# EAGLE board ATSAM_motor (EAGLE 9.1.0)
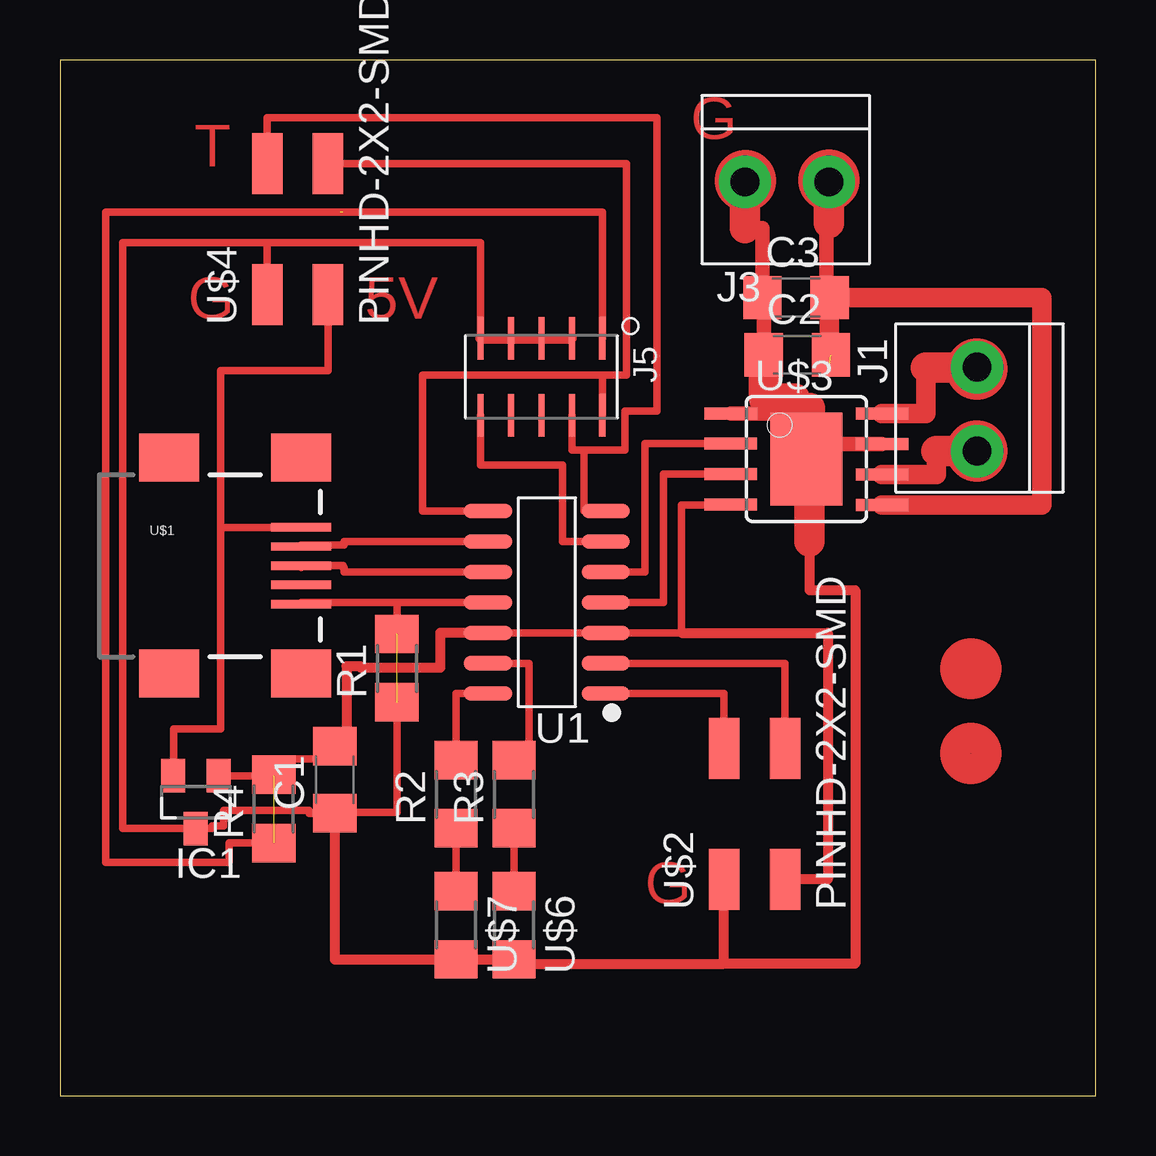
[diagram p0: board, top side]
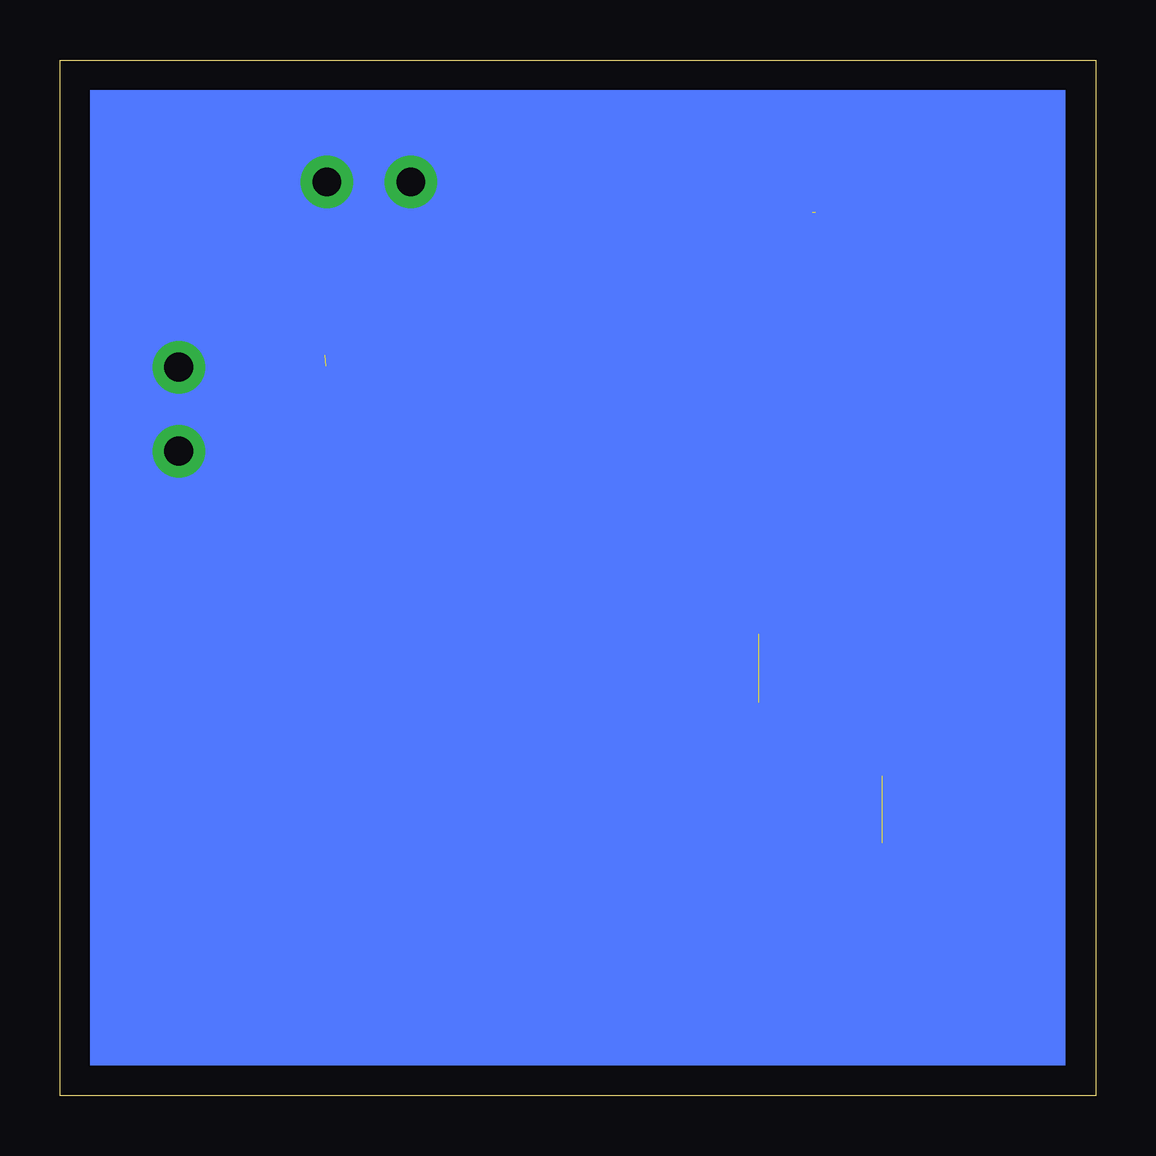
[diagram p1: board, bottom side, seen from below]

Size 43.18 x 43.18 mm. Coordinates in mm from the lower left corner, seen from the top.
Outline: 0,0 43.18,0 43.18,43.18 0,43.18 0,0
Copper layers (1*16): Top 0.035mm / dielectric 1.5mm / Bottom 0.035mm
Design rules "default *": minimum track width 10mil, minimum drill 24mil, track to track 16mil, track to pad 16mil, pad to pad 8mil, via to via 8mil, smd to smd 16mil, copper to edge 40mil, drill to drill 8mil, minimum pad ring 10mil, minimum via ring 8mil, stop-mask expansion 4mil, vias tented up to drill 0mil, thermal gap 10mil

## Footprints (pad centres in the part's own frame; a part is rotated, then mirrored left to right if it is on the bottom)
C1206 = smd 1.6 x 1.8: 1 -1.4,0; 2 1.4,0
SOT23 = smd 1 x 1.4: 1 -0.95,-1.1; 2 0.95,-1.1; 3 0,1.1
ED555DS-2DS = drill 1.2 pad 2.184: 1 1.8,0; 2 -1.7,0
2X5_1.27MM_SMD = smd 1.778 x 0.254: 1 -1.6,2.54; 2 1.6,2.54; 3 -1.6,1.27; 4 1.6,1.27; 5 -1.6,0; 6 1.6,0; 7 -1.6,-1.27; 8 1.6,-1.27; 9 -1.6,-2.54; 10 1.6,-2.54
R1206 = smd 1.6 x 1.803: 1 -1.422,0; 2 1.422,0
SOIC127P600X160-14N = smd 2 x 0.6: 1 -2.45,3.81; 2 -2.45,2.54; 3 -2.45,1.27; 4 -2.45,0; 5 -2.45,-1.27; 6 -2.45,-2.54; 7 -2.45,-3.81; 8 2.45,-3.81; 9 2.45,-2.54; 10 2.45,-1.27; 11 2.45,0; 12 2.45,1.27; 13 2.45,2.54; 14 2.45,3.81
USB_MINIB = smd 2.5 x 0.35: D+ 3.77,0; D- 3.77,0.8; GND 3.77,-1.6; ID 3.77,-0.8; VBUS 3.77,1.6 | smd 2.5 x 2: SHIELD@1 -1.73,-4.5; SHIELD@2 -1.73,4.5; SHIELD@3 3.77,4.5; SHIELD@4 3.77,-4.5
2X02SMD = smd 2.54 x 1.27: 1 -2.54,1.27; 2 2.92,1.27; 3 -2.54,-1.27; 4 2.92,-1.27
SOIC8_PAD = smd 0.5 x 2.2: 1 -1.905,-3.154; 2 -0.645,-3.154; 3 0.625,-3.154; 4 1.895,-3.154; 5 1.905,3.154; 6 0.635,3.154; 7 -0.635,3.154; 8 -1.905,3.154 | smd 3.886 x 2.997: GND 0,0
LED1206 = smd 1.6 x 1.803: 1 -1.422,0; 2 1.422,0

## Placement (x,y rotation side)
C1  [C1206]  11.46,13.18 90 top
C2  [C1206]  30.73,30.89 0 top
C3  [C1206]  30.68,33.27 0 top
IC1  [SOT23]  5.66,12.24 180 top
J1  TERM-1X02-FABLAB  [ED555DS-2DS]  38.23,28.57 90 top
J3  TERM-1X02-FABLAB  [ED555DS-2DS]  30.35,38.1 180 top
J5  [2X5_1.27MM_SMD]  20.07,29.97 270 top
R1  [R1206]  14.05,17.83 90 top
R2  [R1206]  16.51,12.57 90 top
R3  [R1206]  18.92,12.57 90 top
R4  [R1206]  8.92,11.96 90 top
U1  ATSAMD11C14A-SSUT  [SOIC127P600X160-14N]  20.29,20.57 180 top
U$1  CONN_USB_MINIB  [USB_MINIB]  6.27,22.1 0 top
U$2  PINHD-2X2-SMD  [2X02SMD]  28.96,11.56 90 top
U$3  A4953-H-BRIDGE-MOTOR-DRIVER-PAD  [SOIC8_PAD]  31.11,26.54 270 top
U$4  PINHD-2X2-SMD  [2X02SMD]  9.91,35.94 90 top
U$6  LED  [LED1206]  18.92,7.11 270 top
U$7  LED  [LED1206]  16.51,7.11 270 top

## Library data of the parts
C1-C3 IC1 J1 J3 R1-R4 U$1-U$4 U$6 U$7 = fab
J5 = modified_sam; PACKAGE: 2x5_1.27MM_SMD
U1 = ATSAMD11C14A-SSUT; AVAILABILITY: Unavailable; DESCRIPTION: Cortex-M0+, 16KB FLASH, 4KB SRAM, USB - 14 SOIC, INDUSTRIAL, GREEN, 1.6-3.6V, 48MHz/ SOIC .150 _SS_; MF: Microchip; MP: ATSAMD11C14A-SSUT; PACKAGE: SOIC-14 Microchip; PRICE: None

## Nets
5V: IC1.2 U$1.VBUS U$4.3
A+: U1.5 U$3.2
A-: U1.4 U$3.3
CLK/TX1: J5.4 U1.7 U$4.2
D+: U1.10 U$1.D+
D-: U1.9 U$1.D-
DIO/RX1: J5.2 U1.8 U$4.4
GND: C1.1 C2.1 C3.1 IC1.3 J3.1 J5.3 J5.5 J5.7 J5.9 R1.1 R1.2 U1.11 U$1.GND U$2.1 U$3.1 U$3.7 U$3.GND U$4.1 U$6.2 U$7.2
LED1: R3.2 U1.13
LED2: R2.2 U1.14
N$5: R2.1 U$7.1
N$12: J1.1 U$3.8
N$13: J1.2 U$3.6
N$16: R3.1 U$6.1
POT1: U1.1 U$2.2
POT2: U1.2 U$2.4
RST: J5.10 U1.6
V+: C2.2 C3.2 J3.2 U$3.5
VCC: C1.2 IC1.1 J5.1 R4.1 R4.2 U1.3 U1.12 U$2.3 U$3.4

## Tracks (layer width: path | path; a pad name or v marks a point on that pad's centre or on a via)
5V
  Top 0.305: U$1.VBUS 6.7,23.7 | IC1.2 4.75,13.34 4.75,15.29 6.7,15.29 6.7,23.7 | U$4.3 11.18,30.23 6.7,30.23 6.7,23.7
A+
  Top 0.305: U1.5 24.38,21.84 24.38,27.19 U$3.2
A-
  Top 0.305: U1.4 25.15,20.57 25.15,25.92 U$3.3
CLK/TX1
  Top 0.305: J5.4 21.34,26.92 21.84,26.92 | U1.7 21.84,24.38 21.84,26.92 | 21.84,26.92 | U$4.2 8.64,40.77 24.89,40.77 24.89,28.53 23.55,28.53 23.55,26.92 21.84,26.92
D+
  Top 0.305: U$1.D+ 10.04,22.03 U$1.D+ | U1.10 11.85,21.84 11.85,22.03 11.81,22.03 11.81,22.1 U$1.D+
D-
  Top 0.305: 10.04,22.96 U$1.D- 10.04,22.96 | U1.9 11.85,23.11 11.85,22.96 10.04,22.96
DIO/RX1
  Top 0.305: U$4.4 23.62,38.86 23.62,30.05 22.61,30.05 | J5.2 22.61,30.05 | 22.61,30.05 22.48,30.05 15.11,30.05 15.11,24.38 U1.8
GND  (1 unrouted)
  Top 0.305: U1.11 14.05,20.57 | 14.05,20.57 11.85,20.57 11.85,20.56 10.04,20.56 U$1.GND | R1.2 14.05,20.57 | R1.1 14.05,11.81 11.48,11.81 C1.1 10.38,11.78 10.38,11.9 6.83,11.9 6.83,11.25 6.35,11.25 6.35,11.14 IC1.3 2.62,11.14 2.62,35.56 8.51,35.56 8.64,35.56 | 8.64,35.56 17.53,35.56 J5.9 | U$4.1 8.64,35.56
  Top 0.406: C1.1 11.46,5.69 U$7.2 U$6.2 18.92,5.56 18.34,5.56 18.34,5.51 27.69,5.51 | IC1.3 5.66,11.28 | J5.9 J5.7 J5.5 J5.3 | 27.69,5.51 U$2.1 | 27.69,5.51 33.15,5.51 33.15,21.08 31.24,21.08 31.24,26.42 U$3.GND
  Top 0.61: 28.55,36.17 29.28,36.17 C3.1 29.33,33.27 C2.1 | U$3.1 31.27,28.45 31.27,28.68 | U$3.7 31.27,27.18 31.27,26.54
  Top 1.27: J3.1 28.55,36.17 | C2.1 29.33,29.06 30.63,29.06 30.63,28.68 31.27,28.68 31.27,26.54 U$3.GND
LED1
  Top 0.305: U1.13 19.56,18.03 19.56,13.84 19.56,13.99 R3.2
LED2
  Top 0.305: U1.14 16.51,16.76 R2.2
N$1
  Top 1.27: 31.24,25.15 31.24,23.11
N$5
  Top 0.305: R2.1 U$7.1
N$12
  Top 0.813: U$3.8 36.09,28.45 36.09,30.35
  Top 1.27: 36.09,30.35 38.2,30.35 J1.1
N$13
  Top 0.813: 36.52,26.88 36.52,25.91 U$3.6
  Top 1.27: J1.2 36.52,26.88
N$16
  Top 0.305: R3.1 U$6.1
POT1
  Top 0.305: U1.1 27.69,16.76 U$2.2
POT2
  Top 0.305: U$2.4 30.23,18.03 U1.2
RST
  Top 0.305: J5.10 17.53,26.29 20.95,26.29 20.95,23.11 U1.6
V+  (1 unrouted)
  Top 0.61: 32.05,36.37 31.95,36.37 31.95,33.27 C3.2
  Top 0.813: 32.36,30.43 32.08,30.43 C3.2 40.92,33.27 40.92,24.64 U$3.5
  Top 1.27: J3.2 32.05,36.37
VCC  (2 unrouted)
  Top 0.305: U$3.4 27.96,24.64 25.91,24.64 25.91,19.3 U1.3 U1.12 | 11.94,14.73 10.79,14.73 10.79,14.58 C1.2 11.46,14.05 8.89,14.05 8.89,13.38 R4.2 8.91,13.34 IC1.1 6.61,13.39 | R4.1 7.06,10.54 7.06,9.73 1.91,9.73 1.91,36.83 11.81,36.83 | 11.68,36.83 11.81,36.83 | 11.81,36.83 22.61,36.83 J5.1
  Top 0.406: U1.12 15.85,19.3 15.85,17.84 12.54,17.84 12.54,17.91 11.94,17.91 11.94,14.73 | 25.91,19.3 32,19.3 32,9.02 U$2.3
(copper drawn outside any net)
  shapes: Bottom area x1, Top circle x6

## Text on the board
Top: G | T | G | 5V | G